# EAGLE board PCB-3SLIDER45 (EAGLE 6.4)

Size 74 x 37.5 mm. Coordinates in mm from the lower left corner, seen from the top.
Outline: 0,0 74,0 74,37.5 0,37.5 0,0
Copper layers (1*16): Top 0.035mm / dielectric 1.5mm / Bottom 0.035mm
Design rules "Fusion_eagle_rule_v1.1": minimum track width 6mil, minimum drill 12mil, track to track 6mil, track to pad 6mil, pad to pad 6mil, via to via 6mil, smd to smd 0mil, copper to edge 10mil, drill to drill 10mil, minimum pad ring 10mil, minimum via ring 6mil, stop-mask expansion 2mil, vias tented up to drill 100mil, thermal gap 10mil
Net classes: 0 default: width 0.203 mm, drill 0.406 mm, clearance 0.203 mm; 1 Power: width 0.406 mm, drill 0.61 mm, clearance 0.203 mm

## Footprints (pad centres in the part's own frame; a part is rotated, then mirrored left to right if it is on the bottom)
2X4 = drill 1.016 pad 1.88 octagon: 1 -3.81,-1.27; 2 -3.81,1.27; 3 -1.27,-1.27; 4 -1.27,1.27; 5 1.27,-1.27; 6 1.27,1.27; 7 3.81,-1.27; 8 3.81,1.27
0603-CAP = smd 1.1 x 1: 1 -0.85,0; 2 0.85,0
0805 = smd 0.8 x 1.2: 1 -0.9,0; 2 0.9,0
SLIDER45 = drill 1.194 pad 2.54: 1 -29.21,1.75; 2A -29.21,-1.75; 3 29.21,1.75 | drill 1.702: P$1 -23.9,4.2; P$2 23.9,4.2; P$3 25.1,-4.2; P$4 -25.1,-4.2
3.2MMPAD6MM = drill 3.2 pad 6: P$1 0,0

## Placement (x,y rotation side)
ANALOG_OUT  M04X2  [2X4]  24,19.56 0 bottom
C1  10nF  [0603-CAP]  63.37,6.99 0 bottom
C2  10nF  [0603-CAP]  63.5,20.32 0 bottom
C3  10uF  [0805]  3.17,23.11 180 bottom
C5  10nF  [0603-CAP]  63.5,33.02 0 bottom
IN(DAISY)  M04X2  [2X4]  24.13,5.71 0 bottom
POT1  10K  [SLIDER45]  37.35,18.8 180 top
POT2  10K  [SLIDER45]  37.35,31.8 180 top
POT3  10K  [SLIDER45]  37.35,5.8 180 top
SERIAL  M04X2  [2X4]  3.3,16.76 270 bottom
U$1  GNDPAD6MM  [3.2MMPAD6MM]  3.5,33.33 0 top
U$15  GNDPAD6MM  [3.2MMPAD6MM]  3.5,4.12 0 top
U$21  GNDPAD6MM  [3.2MMPAD6MM]  70.5,12.38 0 top

## Library data of the parts
ANALOG_OUT C1-C3 C5 IN(DAISY) SERIAL = SparkFun
POT1-POT3 U$1 U$15 U$21 = SKAARHOJ

## Nets
5V [Power]: C3.1 POT1.1 POT2.1 POT3.1 SERIAL.2
ANALOG1: ANALOG_OUT.1 C2.1 POT1.2A
ANALOG2: ANALOG_OUT.2 C5.1 POT2.2A
ANALOG3: ANALOG_OUT.3 C1.1 POT3.2A
GND [Power]: C1.2 C2.2 C3.2 C5.2 POT1.3 POT2.3 POT3.3 SERIAL.1 U$1.P$1 U$15.P$1 U$21.P$1
N$1: ANALOG_OUT.4 IN(DAISY).1
N$2: ANALOG_OUT.5 IN(DAISY).2
N$3: ANALOG_OUT.6 IN(DAISY).3
N$4: ANALOG_OUT.7 IN(DAISY).4
N$5: ANALOG_OUT.8 IN(DAISY).5

## Tracks (layer width: path | path; a pad name or v marks a point on that pad's centre or on a via)
5V  (4 unrouted)
ANALOG1  (2 unrouted)
ANALOG2  (2 unrouted)
ANALOG3  (2 unrouted)
GND  (10 unrouted)
N$1  (1 unrouted)
N$2  (1 unrouted)
N$3  (1 unrouted)
N$4  (1 unrouted)
N$5  (1 unrouted)

## Text on the board
_bsilk: PCB-3SLIDER45 - v???? | SKAARHOJ 2013